# Altium PCB Copy of PCB1.PcbDoc
Units mil, origin at the board's own origin, x right, y up, seen from the top; angles counter-clockwise.
Board outline 3521.56 x 2561.56 mil, 2 copper layers (Top Layer, Bottom Layer); 40 components, 29 nets, 164 pads, 1 vias.
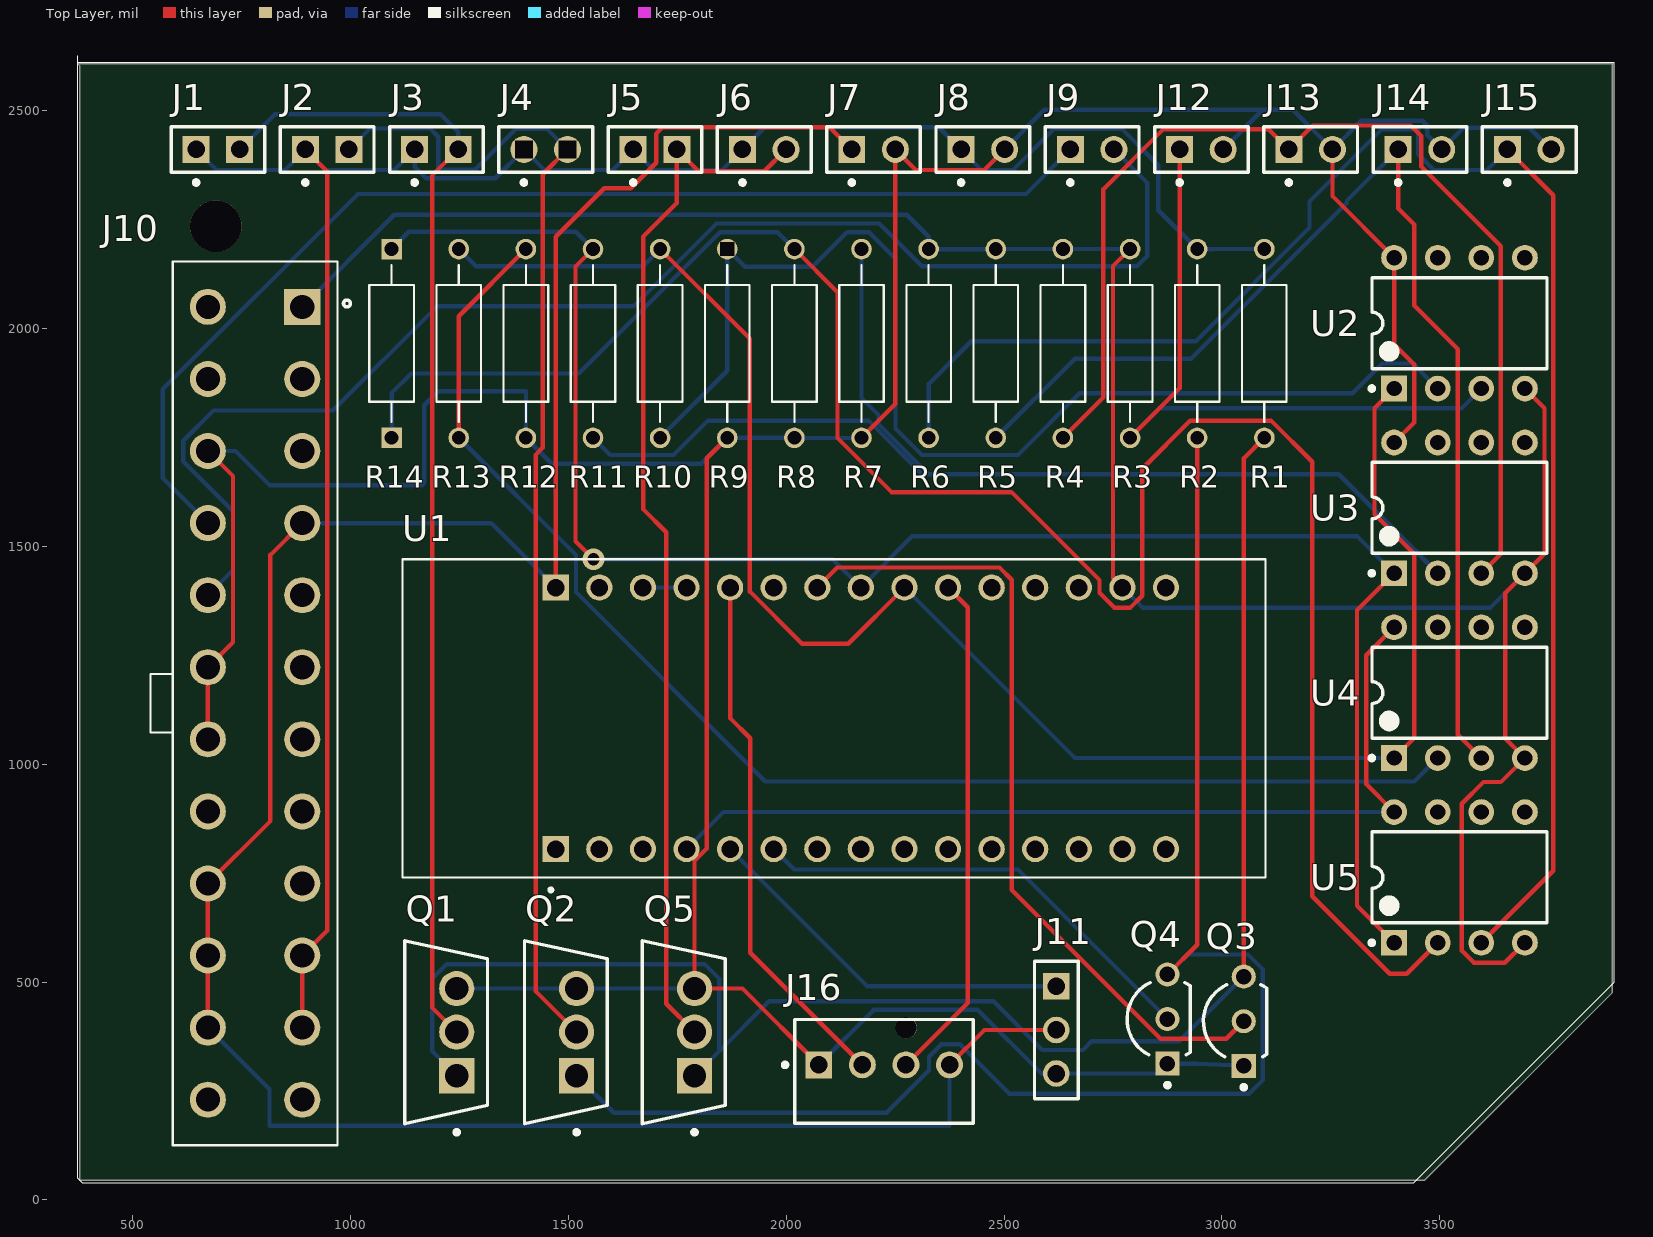
[diagram p0: Top Layer view]
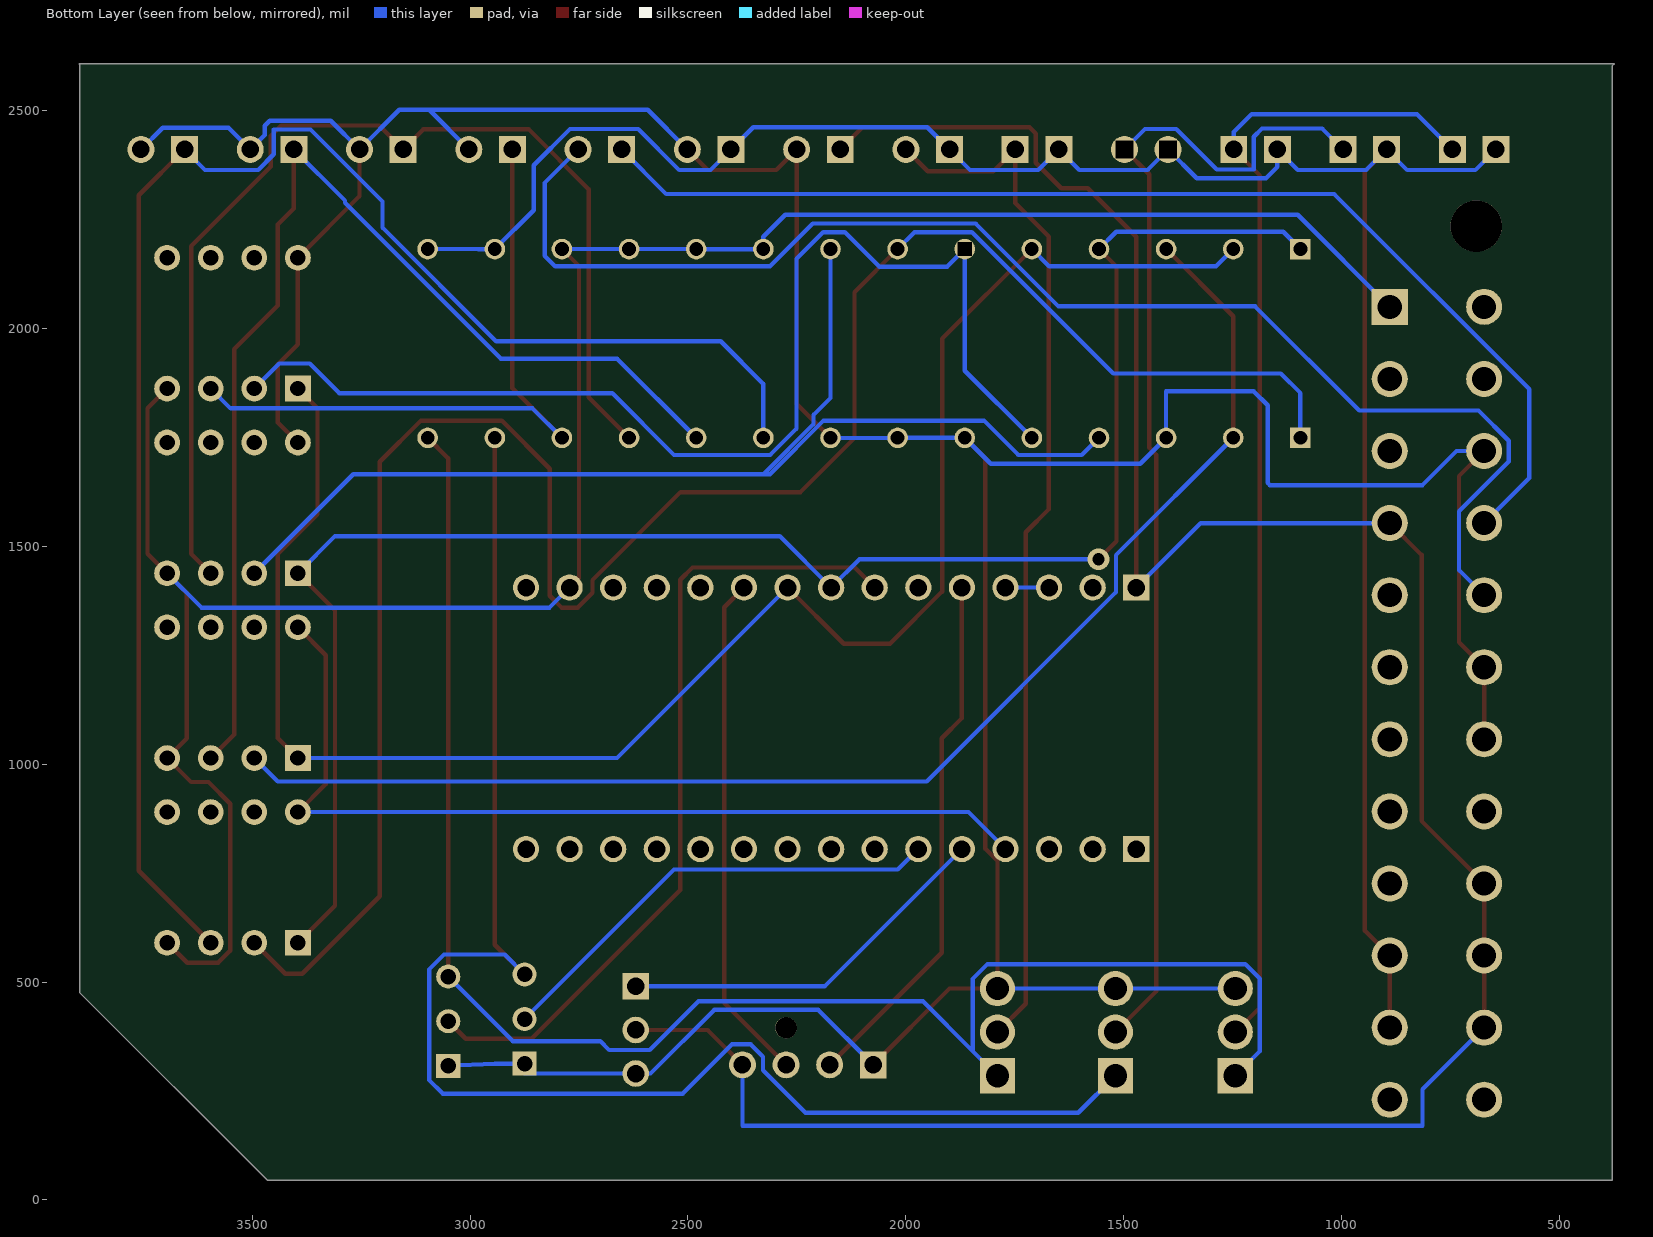
[diagram p1: Bottom Layer view, seen from below]

## Layer stack, top to bottom
Top Solder: solder mask 0.4, Solder Resist, Dk 3.5
Top Layer: signal copper 1.4
Dielectric 1: dielectric 12.6, FR-4, Dk 4.8
Bottom Layer: signal copper 1.4
Bottom Solder: solder mask 0.4, Solder Resist, Dk 3.5

## Board outline
375,2606.56 3896.56,2606.56 3895,2605 3895,475 3465,45 380,45 380,2601.56

## Design rules (kind name [scope] priority, off if disabled: settings)
Clearance [All] p1: gap=10 ignorepadtopadclearanceinfootprint=FALSE except(0: Arc-Hole Track-Hole SMDPad-Hole THPad-Hole Via-Hole Fill-Hole Poly-Hole Region-Hole Text-Hole)
PolygonConnect [All] p1: connectstyle=Relief reliefconductorwidth=10 reliefentries=4 polygonreliefangle="90 Angle" airgapwidth=10
RoutingVias [All] p1: holewidth=28 width=50 viastyle="Through Hole" minholewidth=28 minwidth=50 maxholewidth=28 maxwidth=50
SolderMaskExpansion [All] p1: expansion=4 istentingtop=FALSE
Width [All] p1: maxlimit=10 minlimit=10 preferedwidth=10
30 further rules are at their usual default settings.

## Components (designator, comment, footprint, x,y, rotation, side; value= is the part's Value field where it differs from the comment)
J1 "j10" FP-TSW-102-07-S-S-MFG#1 696.5,2410 r0 top
J2 "j10" FP-TSW-102-07-S-S-MFG#1 947.21,2410 r0 top
J3 "j10" FP-TSW-102-07-S-S-MFG#1 1197.91,2410 r0 top
J4 "j10" FP-TSW-102-07-S-S-MFG#2 1448.62,2410 r0 top
J5 "j10" FP-TSW-102-07-S-S-MFG#1 1699.33,2410 r0 top
J6 "j6" FP-TSW-102-07-S-S-MFG#3 1950.04,2410 r0 top
J7 "j10" FP-TSW-102-07-S-S-MFG#3 2200.75,2410 r0 top
J8 "j16" FP-TSW-102-07-S-S-MFG#3 2451.46,2410 r0 top
J9 "J13" FP-TSW-102-07-S-S-MFG#3 2702.17,2410 r0 top
J10 "1-1775099-3" TE_1-1775099-3 781.73,1139.45 r270 top
J11 "TSW-103-07-L-S" SMTC-TSW-103-07-X-S 2620,490 r270 top
J12 "j10" FP-TSW-102-07-S-S-MFG#3 2952.87,2410 r0 top
J13 "j11" FP-TSW-102-07-S-S-MFG#3 3203.58,2410 r0 top
J14 "j10" FP-TSW-102-07-S-S-MFG#3 3454.29,2410 r0 top
J15 "j11" FP-TSW-102-07-S-S-MFG#3 3705,2410 r0 top
J16 "47053-3000" FP-47053-3000-MFG 2225,295.04 r180 top
Q1 "AUIRFZ44N" FP-TO-220AB-MFG 1220,385 r180 top
Q2 "AUIRFZ44N" FP-TO-220AB-MFG 1495,385 r180 top
Q3 "2N5551RL1G" ONSC-TO-92-3-29-11_AM_BL 3050,410 r90 top
Q4 "2N5551RL1G" ONSC-TO-92-3-29-11_AM_BL 2875,415 r90 top
Q5 "AUIRFZ44N" FP-TO-220AB-MFG 1765.59,385 r180 top
R1 "1k" RESAD1100W55L680D260#1 3097.2,1965 r90 top
R2 "1k" RESAD1100W55L680D260#1 2943.19,1965 r90 top
R3 "1.5k" RESAD1100W55L680D260#1 2789.17,1965 r90 top
R4 "1.5k" RESAD1100W55L680D260#1 2635.16,1965 r90 top
R5 "1.5k" RESAD1100W55L680D260#1 2481.14,1965 r90 top
R6 "1.5k" RESAD1100W55L680D260#1 2327.13,1965 r90 top
R7 "27k" RESAD1100W55L680D260#1 2173.11,1965 r90 top
R8 "27k" RESAD1100W55L680D260#1 2019.09,1965 r90 top
R9 "27k" RESAD1100W55L680D260#2 1865.08,1965 r90 top
R10 "27k" RESAD1100W55L680D260#1 1711.06,1965 r90 top
R11 "27k" RESAD1100W55L680D260#1 1557.05,1965 r90 top
R12 "27k" RESAD1100W55L680D260#1 1403.03,1965 r90 top
R13 "27k" RESAD1100W55L680D260#1 1249.02,1965 r90 top
R14 "27k" RESAD1100W55L680D260#3 1095,1965 r90 top
U1 "NUCLEO-L432KC" MODULE_NUCLEO-L432KC 2110,1105 r90 top
U2 "LM358P" P0008A 3545,2011.57 r90 top
U3 "LM358P" P0008A 3545,1587.72 r90 top
U4 "LM358P" P0008A 3545,1163.86 r90 top
U5 "LM358P" P0008A 3545,740 r90 top

## Footprints (in the part's own frame and the unit in brackets; to place one, negate y for a bottom-side part, rotate by r counter-clockwise, add the part's x,y. Pads: shape width x height; smd on the part's side, far side on the other; paste and mask are expansions set on the pad)
FP-47053-3000-MFG [mm]
  rect 1.57x1.57 hole 1.02 paste-1000 mask+0: 1(3.81,-0.38)
  round 1.57 hole 1.02 paste-1000 mask+0: 2(1.27,-0.38) 3(-1.27,-0.38) 4(-3.81,-0.38)
  round 1.25 hole 1.25 unplated paste-1000 mask+0: ""(-1.27,-2.54)
  silkscreen extent -5.2,-3.02 5.9,3.02, body extent -5.3,-3.26 5.3,3.12, height 0.25
FP-TO-220AB-MFG [mm]
  rect 2.05x2.05 hole 1.35 paste-1000 mask+0: 1(-0.62,2.54)
  round 2.05 hole 1.35 paste-1000 mask+0: 2(-0.62,0) 3(-0.62,-2.54)
  silkscreen extent -2.41,-5.34 2.41,5.96
FP-TSW-102-07-S-S-MFG#1 [mm]
  rect 1.57x1.57 hole 1.02 paste-1000 mask+0: 1(-1.27,0) 2(1.27,0)
  silkscreen extent -2.73,-2.05 2.73,1.34, body extent -2.67,-1.27 2.54,1.27, height 8.71
FP-TSW-102-07-S-S-MFG#2 [mm]
  round 1.57 hole 1.02 square paste-1000 mask+0: 1(-1.27,0) 2(1.27,0)
  silkscreen extent -2.73,-2.05 2.73,1.34, body extent -2.67,-1.27 2.54,1.27, height 8.71
FP-TSW-102-07-S-S-MFG#3 [mm]
  rect 1.57x1.57 hole 1.02 paste-1000 mask+0: 1(-1.27,0)
  round 1.57 hole 1.02 paste-1000 mask+0: 2(1.27,0)
  silkscreen extent -2.73,-2.05 2.73,1.34, body extent -2.67,-1.27 2.54,1.27, height 8.71
MODULE_NUCLEO-L432KC [mm]
  rect 1.53x1.53 hole 1.02: CN3_1(-7.62,16.215) CN4_1(7.62,16.215)
  round 1.53 hole 1.02: CN3_2(-7.62,13.675) CN3_3(-7.62,11.135) CN3_4(-7.62,8.595) CN3_5(-7.62,6.055) CN3_6(-7.62,3.515) CN3_7(-7.62,0.975) CN3_8(-7.62,-1.565) CN3_9(-7.62,-4.105) CN3_10(-7.62,-6.645) CN3_11(-7.62,-9.185) CN3_12(-7.62,-11.725) CN3_13(-7.62,-14.265) CN3_14(-7.62,-16.805) CN3_15(-7.62,-19.345) CN4_2(7.62,13.675) CN4_3(7.62,11.135) CN4_4(7.62,8.595) CN4_5(7.62,6.055) CN4_6(7.62,3.515) CN4_7(7.62,0.975) CN4_8(7.62,-1.565) CN4_9(7.62,-4.105) CN4_10(7.62,-6.645) CN4_11(7.62,-9.185) CN4_12(7.62,-11.725) CN4_13(7.62,-14.265) CN4_14(7.62,-16.805) CN4_15(7.62,-19.345)
  silkscreen extent -10.1,-25.14 9.27,25.14
ONSC-TO-92-3-29-11_AM_BL [mm] "TO, 3-Leads, Body Dia 4.7mm, Pitch 2.6mm"
  rect 1.4x1.4 hole 0.9: 1(-2.6,0)
  round 1.4 hole 0.9: 2(0,0) 3(2.6,0)
  silkscreen extent -3.97,-1.34 2.13,2.35, body extent -2.84,-1.34 2.84,2.35, height 5.33
P0008A [mm] "DIP, 8-Leads, Body 10.15x6.6mm, Pitch 2.54mm"
  rect 1.5x1.5 hole 0.9: 1(-3.81,3.81)
  round 1.5 hole 0.9: 2(-3.81,1.27) 3(-3.81,-1.27) 4(-3.81,-3.81) 5(3.81,-3.81) 6(3.81,-1.27) 7(3.81,1.27) 8(3.81,3.81)
  silkscreen extent -3.93,-5.1 2.65,5.23, body extent -3.95,-5.07 3.95,5.07, height 5.08
RESAD1100W55L680D260#1 [mm]
  round 1.2 hole 0.8: 1(-5.5,0) 2(5.5,0)
  silkscreen extent -4.58,-1.3 4.58,1.3, body extent -5.77,-1.29 5.77,1.29, height 2.6
RESAD1100W55L680D260#2 [mm]
  round 1.2 hole 0.8: 1(-5.5,0)
  round 1.2 hole 0.8 square: 2(5.5,0)
  silkscreen extent -4.58,-1.3 4.58,1.3, body extent -5.77,-1.29 5.77,1.29, height 2.6
RESAD1100W55L680D260#3 [mm]
  rect 1.2x1.2 hole 0.8: 1(-5.5,0) 2(5.5,0)
  silkscreen extent -4.58,-1.3 4.58,1.3, body extent -5.77,-1.29 5.77,1.29, height 2.6
SMTC-TSW-103-07-X-S [mm] ".025 SQ Post Terminal Strip Assembly, 1x3 Pins, Vertical, 2.54mm Pitch, Male"
  rect 1.55x1.55 hole 1.02: 1(0,0)
  round 1.55 hole 1.02: 2(2.54,0) 3(5.08,0)
  silkscreen extent -1.46,-1.27 6.54,1.27, body extent -1.27,-1.27 6.35,1.27, height 8.38
TE_1-1775099-3 [mm]
  rect 2.1x2.1 hole 1.4: 1(-23.1,2.75)
  round 2.1 hole 1.4: 2(-23.1,-2.75) 3(-18.9,2.75) 4(-18.9,-2.75) 5(-14.7,2.75) 6(-14.7,-2.75) 7(-10.5,2.75) 8(-10.5,-2.75) 9(-6.3,2.75) 10(-6.3,-2.75) 11(-2.1,2.75) 12(-2.1,-2.75) 13(2.1,2.75) 14(2.1,-2.75) 15(6.3,2.75) 16(6.3,-2.75) 17(10.5,2.75) 18(10.5,-2.75) 19(14.7,2.75) 20(14.7,-2.75) 21(18.9,2.75) 22(18.9,-2.75) 23(23.1,2.75) 24(23.1,-2.75)
  round 3 hole 3 unplated: ""(-27.8,-2.29)
  silkscreen extent -25.75,-6.1 25.75,5.55

## Part data
J1 J2 J3 J4 J5 J6 J7 J8 J9 J12 J13 J14 J15: library part CMP-1681-00004-5, "CONN HEADER VERT 2POS 2.54MM", Color=Black, Flammability Rating="UL94 V-0", Max Current Rating=7.6A, Max Operating Temperature=125°C, Max Voltage Rating (AC)=550V, Min Operating Temperature=-55°C, Package Quantity=1, Connector Type=Header, Contact Finish - Mating=GOLD, Contact Material=Bronze, Contact Mating Length=0.23inch, Contact Plating=Gold, Contact Shape=Square, Contact Type="Male Pin", Depth=2.54mm, Fastening Type=Pull, Gender=Male, Housing Color=Black, Housing Material=Polyester, Insulation Color=Black, Insulation Material=PBT, Lead Free="Lead Free", Length=5.08mm, Mount="Through Hole", Number of Contacts=2, Number of Positions=2, Number of Rows=1, Orientation=Straight, Packaging=Bulk, Pitch=2.54mm, Radiation Hardening=No, REACH SVHC="No SVHC", RoHS Compliant=Yes, Series=TSW, Termination=Solder, Width=2.54mm
J10: "Conn Power PL 24 POS 4.2mm Solder ST Thru-Hole 24 Terminal 1 Port Box/Tray", Package=None, Centerline_Pitch="4.2 mm[.165 in]", Digi-Key_Part_Number=A127799-ND, Digi-Key_Purchase_URL=https://www.digikey.com.au/product-detail/en/te-connectivity-amp-connectors/1-1775099-3/A127799-ND/5272985?utm_source=snapeda&utm_medium=aggregator&utm_campaign=symbol, MF="TE Connectivity", MP=1-1775099-3, Number_of_Positions=24, Product_Type=Connector, SnapEDA_Link=https://www.snapeda.com/parts/1-1775099-3/TE%20Connectivity%20AMP%20Connectors/view-part/890778/?ref=snap, TE_purchase_URL=https://www.te.com/usa-en/product-1-1775099-3.html?te_bu=Cor&te_type=disp&te_campaign=seda_glo_cor-seda-global-disp-prtnr-fy19-seda-model-bom-cta_sma-317_1&elqCampaignId=32493
J11: library part CMP-1024-00334-1, "0.025\" SQ Post Header, Through-hole, Vertical, -55 to 125 degC, 2.54 mm Pitch, 3-Pin, Male, RoHS", Manufacturer=Samtec, Temperature Range="-55 to 125 degC", ComponentLink1Description="Manufacturer URL", ComponentLink1URL=http://www.samtec.com, ComponentLink2Description=Datasheet, ComponentLink2URL=http://www.samtec.com/documents/webfiles/pdf/TSW_TH.PDF, ComponentLink3Description="Package Specification", ComponentLink3URL=http://www.samtec.com/documents/webfiles/cpdf/TSW-XXX-XX-XXX-X-XX-XXX-MKT.pdf, DatasheetVersion=F-214, Mounting Technology=Through-hole, Orientation=Vertical, PackageDescription=".025[0.64] SQ. Post Terminal Strip Assembly", PackageReference=TSW-103-07-X-S, PackageVersion="DM, 8/1988", PartNumber=TSW-103-07-L-S, Pitch="2.54 mm", RoHS=True
J16: library part CMP-04776-000447-1, "CONN HEADER VERT 4POS 2.54MM", Current Rating=4A, Max Operating Temperature=75°C, Min Operating Temperature=0°C, Package Quantity=12000, Voltage Rating=250V, Contact Material="Copper Alloy", Contact Plating=Tin, Gender=Male, Glow Wire Compliant=Non-compliant, Halogen Free="Low Halogen", Mount="Through Hole", Number of Circuits=4, Number of Contacts=4, Number of Positions=4, Number of Rows=1, Orientation=Straight, Packaging=Bulk, Pitch=2.54mm, REACH SVHC="No SVHC", RoHS Compliant=Yes, Series=47053, Termination="Through Hole"
Q1 Q2 Q5: library part CMP-00196-65872631-1, "AUIRFZ44N Automotive Q101 55V Single N-Channel HEXFET Power MOSFET in a TO-220AB Package, TO220-3, RoHS", Case/Package=TO-220AB, Continuous Drain Current (ID)=49A, Drain to Source Breakdown Voltage=55V, Drain to Source Resistance=17.5mΩ, Gate to Source Voltage (Vgs)=20V, Input Capacitance=1.47nF, Max Junction Temperature (Tj)=175°C, Max Power Dissipation=94W, Min Operating Temperature=-55°C, Package Quantity=1000, Threshold Voltage=2V, Contact Plating=Tin, Drain to Source Voltage (Vdss)=55V, Element Configuration=Single, Fall Time=60ns, Height=16.51mm, Length=10.66mm, Lifecycle Status=Obsolete, Max Operating Temperature=175°C, Mount="Surface Mount, Through Hole", NexarPartId=65872631, Number of Channels=1, Number of Elements=1, Number of Pins=3, On-State Resistance=17.5mΩ, Power Dissipation=94W, Radiation Hardening=No, Rds On Max=17.5mΩ, REACH SVHC="No SVHC", Rise Time=69ns, RoHS=Compliant, Schedule B="8541290080, 8541290080", Turn-Off Delay Time=44ns, Turn-On Delay Time=7.3ns, Width=4.82mm
Q3 Q4: library part CMP-1048-01479-1, "Amplifier Transistor, NPN Silicon, 3-Pin TO-92, Pb-Free, Tape and Reel", Manufacturer="On Semiconductor", ComponentLink1Description="Manufacturer URL", ComponentLink1URL=http://www.onsemi.com/, ComponentLink2Description=Datasheet, ComponentLink2URL=http://www.onsemi.com/pub_link/Collateral/2N5550-D.PDF, ComponentLink3Description="Package Specification", ComponentLink3URL=http://www.onsemi.com/pub_link/Collateral/MAC97-D.PDF, DatasheetVersion="Rev. 5", fT Min (MHz)=100, IC Continuous (A)=0.6, Mounting Technology="Through Hole", PackageDescription="3-Pin Transistor Outline, Body 4.825 x 3.685 mm, Pitch 1.27 mm", PackageReference=TO-92-3-29-11_AM_BL, PackageVersion="Rev. AM", Packing="Tape and Reel", PartNumber=2N5551RL1G, Polarity=NPN, RoHS=TRUE
R1 R2 R3 R4 R5 R6 R7 R8 R9 R10 R11 R12 R13 R14: library part MFR-25FBF52-1K, "1.07 kOhms Â±1% 0.25W, 1/4W Through Hole Resistor Axial - Metal Film", Package="Axial Yageo", Availability="In Stock", Check_prices=https://www.snapeda.com/parts/MFR-25FBF52-1K/Yageo/view-part/?ref=eda, MF=Yageo, MP=MFR-25FBF52-1K, Price=None, Purchase-URL=https://pricing.snapeda.com/search/part/MFR-25FBF52-1K/?ref=eda, SnapEDA_Link=https://www.snapeda.com/parts/MFR-25FBF52-1K/Yageo/view-part/?ref=snap
U1: "STM32 Nucleo-32 development board with STM32L432KC MCU, supports Arduino connectivity", Package=None, Availability=Unavailable, MP=NUCLEO-L432KC, Price=None
U2 U3 U4 U5: library part CMP-2000-06549-1, "Dual Operational Amplifier, 3 to 32 V, 0 to 70 degC, 8-Pin PDIP (P), RoHS, Tape and Reel", Manufacturer="Technik Industrial", Package Description="8-Pin Double In-line Package, Body 9.59 x 6.35 mm, Pitch 2.54 mm", Package Reference=P8, Datasheet URL=http://www.ti.com/lit/ds/symlink/lm358.pdf, Datasheet Version="Rev. T, 04/2015", Manufacturer URL=http://www.technik.com.hk/, Mounting Technology=ThroughHole, Package URL=http://www.ti.com/lit/ml/mpdi001b/mpdi001b.pdf

## Via types
v1: diameter 50, hole 28, Top Layer to Bottom Layer, 1 vias

## Nets (pads, with @x,y where several pads share a name; then routed paths per layer and width w, separated by ;. In a path a pad name is that pad's centre, name@x,y a point inside that pad or via, vN(x,y) a via of type N, cw(c..) or ccw(c..) an arc to the next point about the centre after c; other vN are vias at no path point)
GND: J7.2 J8.2 J10.6 J10.12 J10.14 J11.3 J12.2 J13.2 J14.2 J15.2 J16.1 Q1.3 Q2.3 Q3.1 Q4.1 Q5.3 R7.1 R8.1 R9.1 R12.1 U1.CN3_4 U2.8 U3.8 U4.8 U5.8 | length 11399
  Top Layer w10: J10.14 J10.12 731,1279.66 731,1660.65 J10.6 ; U1.CN3_4 1790,805 1790,778 ; R9.1 1818,1701.39 1818,806 1790,778 ; J16.1 1900,485 Q5.3 1790,778 ; R7.1 2250.75,1826.1 J7.2 2297.75,2363 2454.46,2363 J8.2 ; J13.2 3253.58,2302.99 U2.8 3395,1963 3441,1917 3441,1783.72 U3.8 ; U5.8 3331,954 3331,1249.86 U4.8
  Bottom Layer w10: J10.6 736.81,1718.19 815,1640 1165,1640 1170,1645 1170,1823.17 1201.83,1855 1403.48,1855 1403.48,1748.91 R12.1 1462.5,1689 1805.61,1689 R9.1 1865.61,1749 2018.56,1749 R8.1 2019.56,1748 2172.65,1748 R7.1 ; Q1.3 Q2.3 Q5.3 ; U1.CN3_4 1856.61,890 U5.8 ; J16.1 2201,436 2439.91,436 2585.91,290 J11.3 2875,290 Q4.1 2943,312.64 Q3.1 ; J8.2 2592.46,2501 3093.87,2501 ; J12.2 3093.87,2501 ; J15.2 3705,2460 3554.29,2460 J14.2 3471,2443.29 3471,2464.29 3459.39,2475.91 3319.49,2475.91 J13.2 3162.58,2501 3093.87,2501
NetJ1_1: J1.1 J2.1 J3.1 J4.1 J5.1 J6.1 J8.1 J10.19 J10.21 R1.2 R2.2 | length 5019.1
  Top Layer w10: J10.21 J10.19 947,617.71 947,2360.21 J2.1
  Bottom Layer w10: J1.1 693.5,2363 850.21,2363 J2.1 944.21,2363 1100.91,2363 J3.1 1147.91,2370 1173.91,2344 1332.62,2344 J4.1 1445.62,2363 1602.33,2363 J5.1 1696.33,2363 1853.04,2363 J6.1 1951.04,2461 2350.46,2461 J8.1 2448.46,2363 2520.36,2363 2614.36,2457 2770.72,2457 2854,2373.72 2854,2270.72 R2.2 2943.19,2181 2981.46,2181 R1.2
NetJ1_2: J1.2 J3.2 Q1.2 | length 2665.1
  Top Layer w10: Q1.2 1188,441.41 1188,2350.09 J3.2
  Bottom Layer w10: J1.2 827.5,2491 1206.91,2491 1247.91,2450 J3.2
NetJ2_2: J2.2 J4.2 Q2.2 | length 2755.9
  Top Layer w10: J4.2 1442,2353.38 1442,1726 1426,1710 1426,478.41 Q2.2
  Bottom Layer w10: J2.2 1045.21,2458 1183.1,2458 1202.01,2439.09 1202.01,2364.09 1286.82,2364.09 1379.73,2457 1451.62,2457 J4.2
NetJ5_2: J5.2 J6.2 Q5.2 | length 2398
  Top Layer w10: Q5.2 1725,450 1725,1532 1672,1585 1672,2210 1749.33,2287.33 J5.2 1799.33,2360 1950.04,2360 J6.2
NetJ7_1: J7.1 J10.7 J10.18 J10.20 J10.22 J11.2 J16.4 U1.CN4_1 | length 5801.1
  Top Layer w10: J10.22 J10.20 673,560.71 673,675.54 J10.18 817,869.6 817,1479.83 J10.7 ; U1.CN4_1 1471.61,2210 1582.61,2321 1643.61,2321 1702,2379.39 1702,2446.39 1716.61,2461 2099.75,2461 J7.1 ; J16.4 2455,390 J11.2
  Bottom Layer w10: J10.22 815,253.82 815,170 2375,170 J16.4 ; J10.7 1323.78,1552.83 U1.CN4_1
NetJ9_1: J9.1 J10.8 | length 2660.2
  Bottom Layer w10: J10.8 570,1656.3 570,1860.3 1017.7,2308 2550.17,2308 J9.1
NetJ9_2: J9.2 J10.10 | length 3170
  Bottom Layer w10: J10.10 731,1445.02 731,1580 617,1694 617,1741.66 686.34,1811 960,1811 1199,2050 1650,2050 1840.16,2240.16 2213.84,2240.16 2312,2142 2804.83,2142 2829,2166.17 2829,2333.17 J9.2
NetJ10_1: J10.1 R3.2 R4.2 R5.2 R6.2 U1.CN4_14 U2.4 U3.4 U4.4 U5.4 | length 5436.4
  Top Layer w10: U1.CN4_14 2750,1426.61 2750,2142.36 R3.2 ; U5.4 3649,544 3578,544 3550,572 3550,908.86 3600,958.86 3640,958.86 U4.4 3650,1058.86 3650,1392.72 U3.4 3740,1482.72 3740,1816.57 U2.4
  Bottom Layer w10: J10.1 1101.26,2260.16 2276.97,2260.16 2327.13,2210 R6.2 2327.66,2181 2480.61,2181 R5.2 R4.2 R3.2 ; U1.CN4_14 2817.61,1359 3616.28,1359 U3.4
NetJ11_1: J11.1 U1.CN3_5 | length 878.9
  Bottom Layer w10: U1.CN3_5 2186.61,490 J11.1
NetJ12_1: J12.1 R3.1 U2.3 | length 1561.3
  Top Layer w10: R3.1 2902.87,1862.17 J12.1
  Bottom Layer w10: R3.1 2856.71,1816 3549.43,1816 U2.3
NetJ13_1: J13.1 R4.1 U3.3 | length 2544.2
  Top Layer w10: R4.1 2728,1841.31 2728,2319 2865,2456 3107.58,2456 J13.1 3208.58,2465 3433,2465 3457,2441 3457,2371 3640,2188 3640,1482.72 U3.3
NetJ14_1: J14.1 R5.1 U4.3 | length 2675.2
  Top Layer w10: J14.1 3404.29,2274.71 3441,2238 3441,2052 3541,1952 3541,1067.86 U4.3
  Bottom Layer w10: R5.1 2662.68,1930 2929.29,1930 3287,2287.71 3287,2292.71 J14.1
NetJ15_1: J15.1 R6.1 U5.3 | length 3751.7
  Top Layer w10: U5.3 3760,755 3760,2305 J15.1
  Bottom Layer w10: R6.1 2327.13,1872.13 2425,1970 2940.29,1970 3201,2230.71 3201,2290.71 3366.2,2455.91 3450.2,2455.91 3450.2,2398.91 3486.1,2363 3608,2363 J15.1
NetJ16_2: J16.2 U1.CN4_5 | length 1220.7
  Top Layer w10: U1.CN4_5 1871.61,1105.39 1918,1059 1918,567 J16.2
NetJ16_3: J16.3 U1.CN4_10 | length 1172.6
  Top Layer w10: J16.3 2417,452 2417,1359.61 U1.CN4_10
NetQ1_1: Q1.1 Q3.3 Q5.1 R1.1 | length 3800.4
  Top Layer w10: Q3.3 3050,1701.26 R1.1
  Bottom Layer w10: Q1.1 1188,341.41 1188,507.41 1221.59,541 1813,541 1847,507 1847,342 ; Q5.1 1847,342 ; Q3.3 2901.64,364 2701,364 2681,344 2588,344 2476,456 1961,456 1847,342
NetQ2_1: Q2.1 Q4.3 R2.1 | length 3517.6
  Top Layer w10: Q4.3 2943.19,585.55 R2.1
  Bottom Layer w10: Q2.1 1604.41,200 2230.39,200 2328,297.61 2328,328.61 2356.39,357 2399,357 2512,244 3062.81,244 3094,275.19 3094,528.64 3059.64,563 2920.64,563 Q4.3
NetQ3_2: Q3.2 U1.CN4_7 | length 1878.6
  Top Layer w10: U1.CN4_7 2117.61,1451 2489.61,1451 2518,1422.61 2518,711 2859,370 3010,370 Q3.2
NetQ4_2: Q4.2 U1.CN3_6 | length 1064.9
  Bottom Layer w10: U1.CN3_6 2018.61,758 2532,758 Q4.2
NetR7_2: R7.2 R11.1 U3.2 | length 2712.4
  Bottom Layer w10: R11.1 1596.51,1709 1742,1709 1821,1788 2189,1788 2312,1665 2327,1665 ; R7.2 2173.11,1839.89 2212,1801 2212,1780 2327,1665 ; U3.2 3267.72,1665 2327,1665
NetR8_2: R8.2 R14.1 U5.2 | length 4712.5
  Top Layer w10: R8.2 2118,2082.63 2118,1747.99 2241.99,1624 2516.99,1624 2719,1421.99 2719,1392.99 2752.99,1359 2789.95,1359 2817,1386.05 2817,1677.66 2927.34,1788 3112.57,1788 3207,1693.57 3207,697 3385,519 3424,519 U5.2
  Bottom Layer w10: R14.1 1095,1851 1140,1896 1524.46,1896 1848.61,2220.16 1980.47,2220.16 R8.2
NetR9_2: R9.2 R10.1 U2.2 | length 2727.1
  Bottom Layer w10: R10.1 1865.08,1902.48 R9.2 1905.61,2141 2060.84,2141 2140,2220.16 2190,2220.16 2251,2159.16 2251,1769.62 2311.62,1709 2532,1709 2674,1851 3300,1851 3368,1919 3437.57,1919 U2.2
NetR10_2: R10.2 R13.2 U1.CN4_9 U2.1 U4.1 | length 4032.1
  Top Layer w10: R10.2 1917,1975.6 1917,1395.61 2036.61,1276 2142.61,1276 U1.CN4_9 ; U4.1 3441,1059.86 3441,1482 3350,1573 3350,1816.57 U2.1
  Bottom Layer w10: R13.2 1288.55,2142 1671.53,2142 R10.2 ; U1.CN4_9 2662.76,1013.86 U4.1
NetR11_2: R11.2 R14.2 U1.CN4_8 U3.1 U5.1 | length 4106.1
  Top Layer w10: R11.2 1517,2141.49 1517,1511 v1(1558,1470) ; U5.1 3310,675 3310,1352.72 U3.1
  Bottom Layer w10: R14.2 1134.46,2221 1517.58,2221 R11.2 ; v1(1558,1470) 2106.61,1470 U1.CN4_8 2289.61,1523 3309.72,1523 U3.1
NetR12_2: R12.2 R13.1 U4.2 | length 3141.5
  Top Layer w10: R13.1 1249.02,2027.52 R12.2
  Bottom Layer w10: R13.1 1518,1479.48 1518,1394.48 1952.48,960 3441.14,960 U4.2
NetU1_CN4_3: U1.CN4_3 U1.CN4_4 | length 100
  Bottom Layer w10: U1.CN4_3 U1.CN4_4
NetU1_CN4_11: U1.CN4_11
NetU1_CN4_12: U1.CN4_12
pads on no net: J10. J10.2 J10.3 J10.4 J10.5 J10.9 J10.11 J10.13 J10.15 J10.16 J10.17 J10.23 J10.24 J16. U1.CN3_1 U1.CN3_2 U1.CN3_3 U1.CN3_7 U1.CN3_8 U1.CN3_9 U1.CN3_10 U1.CN3_11 U1.CN3_12 U1.CN3_13 U1.CN3_14 U1.CN3_15 U1.CN4_2 U1.CN4_6 U1.CN4_13 U1.CN4_15 U2.5 U2.6 U2.7 U3.5 U3.6 U3.7 U4.5 U4.6 U4.7 U5.5 U5.6 U5.7

## Silkscreen, mask and mechanical layers (free items; w line width, h text height)
Top Overlay:
  lines w0.5: 375,2625 375,50 385,40 3440,40 3900,500 3900,2610 375.6,2610